# Altium PCB BABA03A_V3.0.0.PcbDoc (part 2 of 2)
Units mil, origin at the board's own origin, x right, y up, seen from the top; angles counter-clockwise.
Board outline 7913.84 x 2796.11 mil, 2 copper layers (Top Layer, Bottom Layer); 189 components, 144 nets, 645 pads, 163 vias.
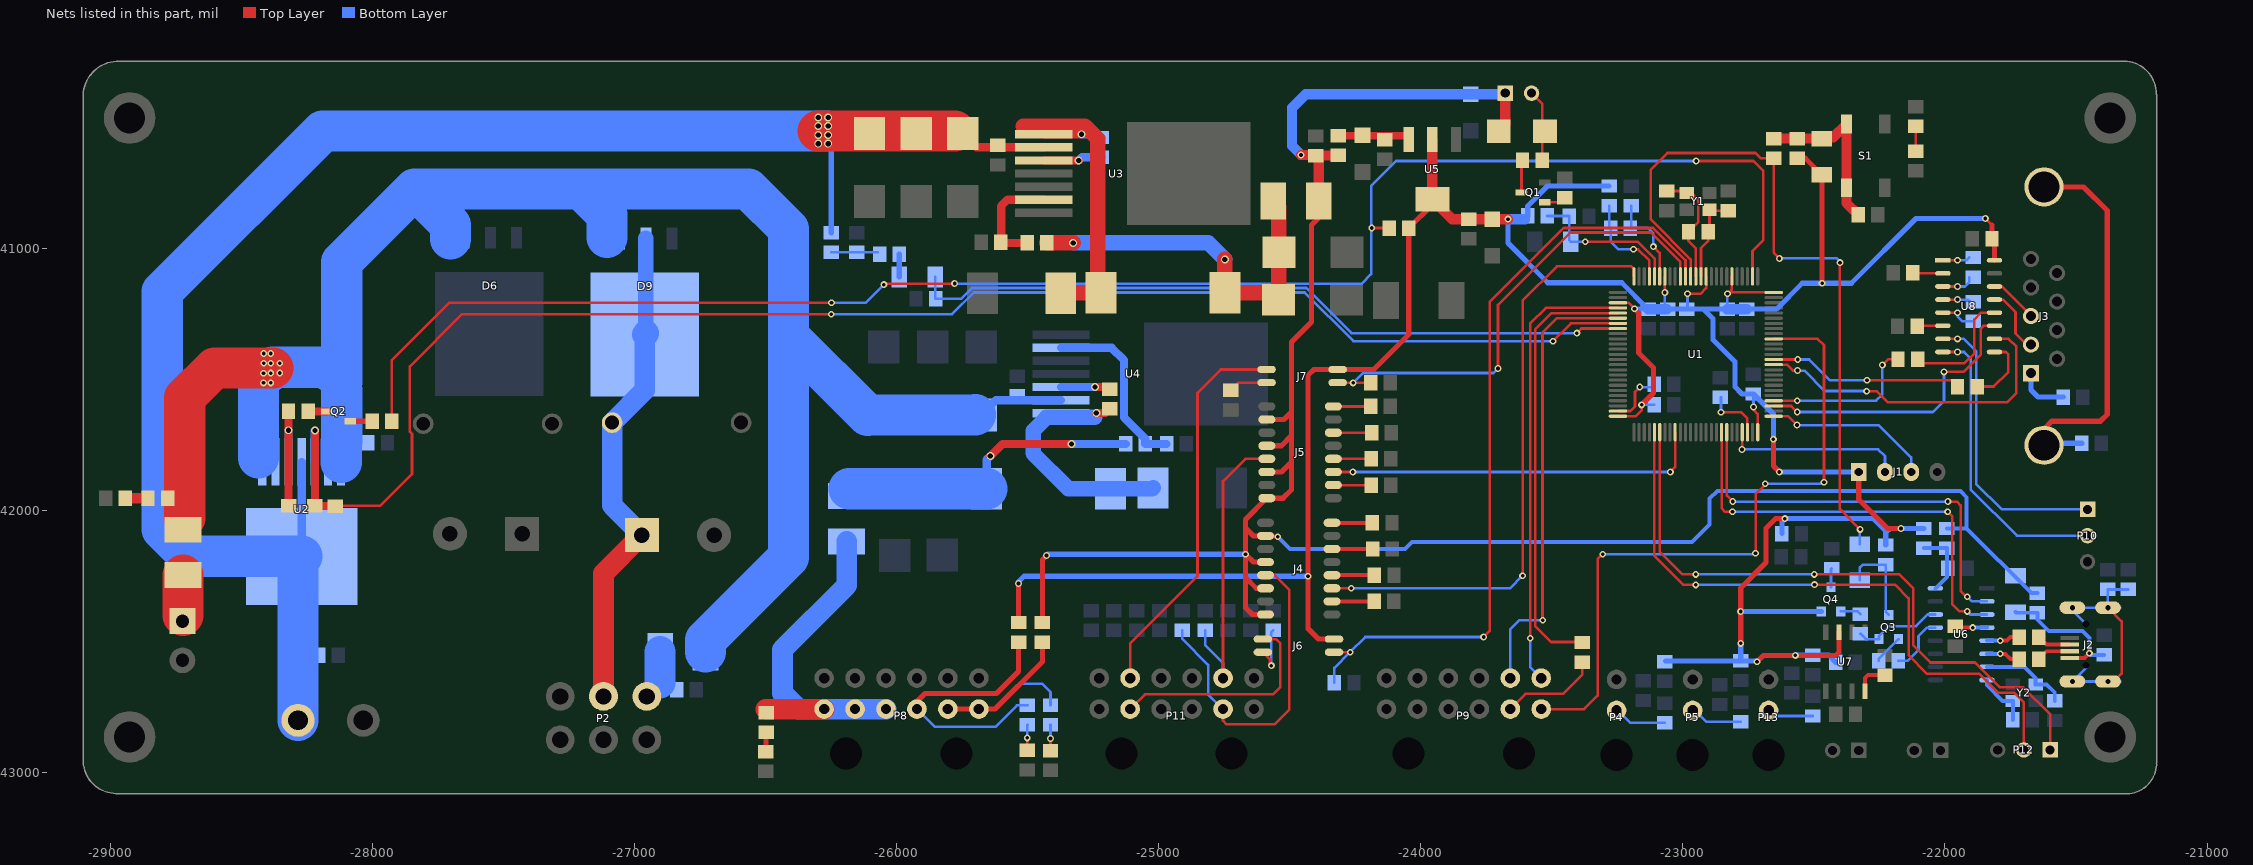
[diagram p2: the nets of this part, all layers, seen from the top]

## Via types
v1: diameter 26, hole 14, Top Layer to Bottom Layer, tented both sides, 145 vias
v2: diameter 30, hole 20, Top Layer to Bottom Layer, tented both sides, 18 vias

## Nets (pads, with @x,y where several pads share a name; then routed paths per layer and width w, separated by ;. In a path a pad name is that pad's centre, name@x,y a point inside that pad or via, vN(x,y) a via of type N, cw(c..) or ccw(c..) an arc to the next point about the centre after c; other vN are vias at no path point) (continued)
NetC1_2: C1.2 D1.1 R1.2 R3.1 S1.2 S1.3 | length 620
  Top Layer w39.37: R1.2@-22654,-40579.6 -22470.61,-40579.6 D1.1@-22470,-40580.21 ; -22426.28,-40574.4 S1.2@-22375.83,-40523.95 S1.3@-22375.83,-40768.05 -22375.83,-40825.57 C1.2@-22331.4,-40870
NetC7_1: C7.1 R10.1 U1.20 | length 357.6
  Top Layer w10: v1(-23113,-40992) -23088.8,-41016.2 U1.20@-23088.8,-41105.76
  Bottom Layer w10: R10.1@-23197,-40836.4 -23197,-40916.4 C7.1@-23201.6,-40921 -23134,-40921 -23113,-40942 v1(-23113,-40992)
NetC7_2: C7.2 R9.1 U1.22 | length 378.6
  Top Layer w10: v1(-23189,-41002) -23171,-41002 -23128.17,-41044.83 U1.22@-23128.17,-41105.76
  Bottom Layer w10: R9.1@-23282,-40835.4 -23282,-40915.4 C7.2@-23276.4,-40921 -23276.4,-40972.6 -23247,-41002 v1(-23189,-41002)
NetC8_1: C8.1 U1.49 | length 203.6
  Top Layer w10: U1.49@-23248.24,-41619.54 -23200.54,-41619.54 -23183,-41602 -23183,-41546 v1(-23165,-41528)
  Bottom Layer w10: v1(-23165,-41528) C8.1@-23115.4,-41528
NetC9_1: C9.1 U1.73 | length 219.7
  Top Layer w10: v1(-22855,-41624) -22779,-41624 -22754.15,-41648.85 U1.73@-22754.15,-41700.24
  Bottom Layer w10: v1(-22855,-41624) -22855,-41567.4 C9.1@-22854.6,-41567
NetC20_1: C20.1 D5.2 L1.1 U3.1 | length 1227.2
  Top Layer w31.5: U3.1@-25439.9,-40562.99 v2(-25295.55,-40562.99)
  Top Layer w59.06: -25518.55,-40531.99 -25282.55,-40531.99 -25234.55,-40579.99 -25234.55,-41104.21 L1.1@-25220.77,-41117.99 ; D5.2@-25374.95,-41169.99 -25372.95,-41167.99 L1.1@-25220.77,-41167.99
  Bottom Layer w31.5: v2(-25295.55,-40562.99) -25233.15,-40562.99 C20.1@-25220.55,-40575.59
NetC20_2: C20.2 U3.3 | length 224.6
  Top Layer w31.5: U3.3@-25439.9,-40662.99 v2(-25306.55,-40662.99)
  Bottom Layer w31.5: v2(-25306.55,-40662.99) -25293.95,-40650.39 C20.2@-25220.55,-40650.39
NetC26_1: C26.1 R16.2 U2.3 | length 482.5
  Top Layer w31.5: R16.2@-28322.4,-41620 -28322,-41620.4 v2(-28322,-41693) C26.1@-28322,-41981.6
  Bottom Layer w31.5: U2.3@-28322,-41813.76 v2(-28322,-41693)
NetC28_1: C28.1 C29.1 F2.1 L1.2 R15.2 | length 1403.1
  Top Layer w59.06: R15.2@-25428.15,-40977.99 v2(-25327.55,-40977.99) ; v2(-24748.55,-41040.99) -24748.55,-41167.77 L1.2@-24748.33,-41167.99 -24569.55,-41167.99 C29.1@-24543.55,-41193.99 C28.1@-24543.55,-41013.99 ; F2.1@-24543.55,-40839.61 -24542.55,-40840.61 C28.1@-24542.55,-41013.99
  Bottom Layer w59.06: v2(-25327.55,-40977.99) -24811.55,-40977.99 v2(-24748.55,-41040.99)
NetC31_1: C31.1 F1.1 P2.1 | length 119.6
  Bottom Layer w118.11: -26903.61,-42657.61 F1.1@-26903.61,-42538
NetC32_1: C32.1 D10.2 L2.1 U4.1 | length 916.7
  Top Layer w31.5: v2(-25239,-41627) -25204.16,-41627 C32.1@-25187.55,-41610.39
  Bottom Layer w59.06: -25244.44,-41643.99 -25429.55,-41643.99 -25480.55,-41694.99 -25480.55,-41780.99 -25345.55,-41915.99 L2.1@-25185.33,-41915.99 -25025.55,-41915.99 D10.2@-25022.55,-41912.99
NetC32_2: C32.2 U4.3 | length 189.5
  Top Layer w31.5: v2(-25244.55,-41527.99) -25195.15,-41527.99 C32.2@-25187.55,-41535.59
  Bottom Layer w31.5: U4.3@-25373.9,-41527.99 v2(-25244.55,-41527.99)
NetC33_1: C33.1 D8.2 D9.2 P2.2 | length 1909
  Top Layer w78.74: P2.2@-27120,-42708.65 -27120,-42239.41 C33.1@-26973.59,-42093
  Bottom Layer w59.06: D9.2@-26958,-41322.91 D9.2@-26958,-40960.66
  Bottom Layer w78.74: C33.1@-26973.59,-42093 -27087,-41979.59 D8.2@-27087,-41664 -26962.09,-41539.09 D9.2@-26962.09,-41327
  Bottom Layer w100: D9.2@-26962.09,-41327 D9.2@-26958,-41322.91
NetC38_1: C38.1 C39.1 F3.1 L2.2 R22.2 | length 1191.8
  Top Layer w31.5: v2(-25643.55,-41790.99) -25597.55,-41744.99 v2(-25333.55,-41744.99)
  Bottom Layer w31.5: L2.2@-25657.77,-41915.99 -25657.77,-41805.21 v2(-25643.55,-41790.99) ; v2(-25333.55,-41744.99) R22.2@-25126.95,-41744.99
  Bottom Layer w157.48: F3.1@-26183,-41915.99 L2.2@-25657.77,-41915.99
NetC42_1: C42.1 C43.2 R29.2 U5.3 | length 275.3
  Top Layer w30: R29.2@-24316.55,-40568.59 -24061.33,-40568.59 U5.3@-24047.1,-40582.82
NetC46_1: C46.1 D16.1 J2.1 R36.2 | length 538.5
  Top Layer w15: J2.1@-21524.14,-42561.93 -21466.93,-42561.93 v1(-21449,-42544)
  Bottom Layer w15: D16.1@-21731,-42386.79 -21728.39,-42389.4 R36.2@-21647,-42389.4 -21647,-42416 -21604,-42459 -21475,-42459 -21449,-42485 v1(-21449,-42544) -21442.6,-42550.4 C46.1@-21393,-42550.4
NetC47_1: C47.1 R33.2 R34.2 U6.16 | length 259.8
  Bottom Layer w15: R34.2@-22081,-42142.4 R33.2@-21993,-42142.4 -21993,-42252.15 U6.16@-22036.85,-42296
NetC48_1: C48.1 U6.4 | length 121.3
  Top Layer w15: C48.1@-21959,-42440.4 -21953.4,-42446 v1(-21894,-42446)
  Bottom Layer w15: v1(-21894,-42446) U6.4@-21840,-42446
NetC49_1: C49.1 J2.0 R40.2 | length 1020.5
  Top Layer w10: J2.0@-21378,-42651.5 -21356.5,-42651.5 -21326,-42621 -21326,-42422 J2.0@-21378,-42370
  Bottom Layer w10: J2.0@-21461.66,-42589.49 -21461.66,-42599.33 J2.0@-21513.83,-42651.5 J2.0@-21378,-42651.5 J2.0@-21331,-42651.5 ; J2.0@-21461.66,-42432.01 -21513.83,-42379.84 J2.0@-21513.83,-42370 J2.0@-21378,-42370 ; J2.0@-21331,-42370 J2.0@-21378,-42370 ; C49.1@-21300,-42300.4 -21378,-42300.4 R40.2@-21379,-42299.4 -21379,-42369 J2.0@-21378,-42370
NetC50_1: C50.1 U6.7 Y2.3 | length 346.1
  Bottom Layer w15: U6.7@-21840,-42596 -21696,-42596 -21654.39,-42637.61 Y2.3@-21654.39,-42663 -21612,-42663 -21581,-42694 C50.1@-21581,-42725.6
NetC51_1: C51.1 U6.8 Y2.1 | length 216
  Bottom Layer w15: U6.8@-21840,-42646 -21840,-42666 -21780.01,-42725.99 Y2.1@-21741,-42725.99 -21741,-42797.6 C51.1@-21741.4,-42798
NetC55_1: C55.1 U8.1 | length 104.3
  Top Layer w10: U8.1@-22008,-41044 v1(-21952,-41044)
  Bottom Layer w10: v1(-21952,-41044) -21918.4,-41044 C55.1@-21908,-41033.6
NetC55_2: C55.2 U8.3 | length 126.5
  Top Layer w10: U8.3@-22008,-41144 v1(-21952,-41144)
  Bottom Layer w10: v1(-21952,-41144) -21923.6,-41144 -21908,-41128.4 C55.2@-21908,-41108.4
NetC57_1: C57.1 U8.4 | length 108.6
  Top Layer w10: U8.4@-22008,-41194 v1(-21952,-41194)
  Bottom Layer w10: v1(-21952,-41194) -21911.6,-41194 C57.1@-21903,-41202.6
NetC57_2: C57.2 U8.5 | length 146.3
  Top Layer w10: U8.5@-22008,-41244 v1(-21952,-41244)
  Bottom Layer w10: v1@-21958,-41244 v1@-21952,-41250 ; v1(-21952,-41244) v1@-21952,-41250 ; C57.2@-21893,-41277.4 -21934,-41277.4 -21952,-41259.4 v1@-21952,-41250
NetC58_2: C58.2 U8.2 | length 116.2
  Top Layer w10: C58.2@-22123,-41091 -22120,-41094 U8.2@-22008,-41094
NetC59_2: C59.2 U8.6 | length 99
  Top Layer w10: C59.2@-22106.6,-41295 -22105.6,-41294 U8.6@-22008,-41294
NetD2_1: D2.1 LS1.2 R5.1 | length 273.7
  Top Layer w10: LS1.2@-23578,-40406 -23537.6,-40446.4 R5.1@-23537.6,-40663
NetD3_1: D3.1 R12.1 | length 95.2
  Top Layer w10: R12.1@-22112,-40627.6 D3.1@-22112,-40532.4
NetD11_1: D11.1 R25.1 | length 86.2
  Top Layer w39.37: D11.1@-28944.6,-41952 R25.1@-28858.4,-41952
NetD12_1: D12.1 R27.2 | length 86.4
  Bottom Layer w20: D12.1@-25991.6,-41107.4 R27.2@-25991.6,-41021
NetD13_1: D13.1 R28.1 | length 73.2
  Top Layer w20: D13.1@-26499.75,-42918.68 R28.1@-26499.75,-42845.48
NetD14_1: D14.1 R18.1 | length 98.2
  Top Layer w10: D14.1@-25414,-42915.6 v1(-25414,-42869)
  Bottom Layer w10: v1(-25414,-42869) R18.1@-25414,-42817.4
NetD15_1: D15.1 R23.1 | length 97.6
  Top Layer w10: D15.1@-25503,-42914.6 v1(-25503,-42867)
  Bottom Layer w10: v1(-25503,-42867) -25503,-42818.4 R23.1@-25502,-42817.4
NetD17_2: D17.2 Q3.3 R35.2 | length 349.7
  Bottom Layer w10: D17.2@-22325,-42266 -22325,-42216.79 -22313.61,-42205.4 R35.2@-22226,-42205.4 -22226,-42386.08 Q3.3@-22214.6,-42397.48
NetF4_1: F4.1 P8.1 P8.2 R18.2 | length 887.8
  Top Layer w20: P8.2@-25805.56,-42757 P8.1@-25687.45,-42757 -25625.67,-42757 -25445,-42576.33 F4.1@-25445,-42501.4
  Bottom Layer w10: P8.1@-25687.45,-42757 -25629,-42757 -25532,-42660 -25446,-42660 -25414,-42692 R18.2@-25414,-42742.6
NetF5_1: F5.1 P8.3 R23.2 | length 1060.1
  Top Layer w20: P8.3@-25923.67,-42757 -25923.67,-42728.67 -25893,-42698 -25620,-42698 -25536,-42614 F5.1@-25536,-42501.4
  Bottom Layer w10: P8.3@-25923.67,-42757 -25855.67,-42825 -25624.45,-42825 -25542.05,-42742.6 R23.2@-25502,-42742.6
NetF6_1: F6.1 P7.1 | length 154.4
  Top Layer w157.48: P7.1@-28725,-42400 F6.1@-28725,-42245.61
NetJ2_2: J2.2 R37.2 | length 130.1
  Top Layer w15: R37.2@-21642,-42566 -21612.34,-42536.34 J2.2@-21524.14,-42536.34
NetJ2_3: J2.3 R38.2 | length 129.8
  Top Layer w15: R38.2@-21642,-42482 -21613.25,-42510.75 J2.3@-21524.14,-42510.75
NetJ3_1: J3.1 R49.2 | length 198.8
  Bottom Layer w20: J3.1@-21672,-41475 -21672,-41539 -21645,-41566 R49.2@-21548.4,-41566
NetJ3_2: J3.2 U8.13 | length 257.8
  Top Layer w10: U8.13@-21811.15,-41194 -21779,-41194 -21731,-41242 -21731,-41323 -21688,-41366 J3.2@-21672,-41366
NetJ3_3: J3.3 U8.14 | length 187.1
  Top Layer w10: U8.14@-21811.15,-41144 -21783,-41144 -21672,-41255 J3.3@-21672,-41257
NetJ3_10: J3.10 J3.11 R52.2 | length 1528.8
  Top Layer w20: J3.11@-21622,-41750 -21622,-41689 -21591,-41658 -21407,-41658 -21381,-41632 -21381,-40854 -21471,-40764 J3.10@-21622,-40764
  Bottom Layer w20: J3.11@-21622,-41750 -21614,-41742 R52.2@-21478.4,-41742
NetJ4_2: J4.2 R55.1 | length 161.2
  Top Layer w15: J4.2@-24339.58,-42345.99 R55.1@-24178.4,-42346
NetJ4_4: J4.4 R61.1 | length 161.7
  Top Layer w15: J4.4@-24339.58,-42245.99 R61.1@-24177.85,-42245.99
NetJ4_6: J4.6 R67.1 | length 155.7
  Top Layer w15: J4.6@-24339.58,-42145.99 R67.1@-24183.85,-42145.99
NetJ4_8: J4.8 R73.1 | length 154.2
  Top Layer w15: J4.8@-24339.58,-42045.99 R73.1@-24185.4,-42046
NetJ5_2: J5.2 R58.1 | length 141.2
  Top Layer w10: J5.2@-24334.58,-41901.99 R58.1@-24193.41,-41901.99
NetJ5_4: J5.4 R64.1 | length 145.2
  Top Layer w10: J5.4@-24334.58,-41801.99 R64.1@-24189.4,-41802
NetJ5_6: J5.6 R70.1 | length 146.2
  Top Layer w10: J5.6@-24334.58,-41701.99 R70.1@-24188.4,-41702
NetJ5_8: J5.8 R76.1 | length 142.2
  Top Layer w10: J5.8@-24334.58,-41601.99 R76.1@-24192.4,-41602
NetJ6_2: J6.2 R78.1 | length 205.1
  Top Layer w10: J6.2@-24603.3,-42543.24 J6.2@-24603.3,-42539.99 -24576.13,-42567.16 -24576.13,-42585.87 v1(-24571,-42591)
  Bottom Layer w10: v1(-24571,-42591) -24571,-42463.4 R78.1@-24564,-42456.4
NetJ7_2: J7.2 R79.1 | length 149
  Top Layer w10: R79.1@-24726,-41540.6 -24696.39,-41510.99 J7.2@-24589.3,-41510.99
NetP4_1: P4.1 R45.1 | length 205.3
  Bottom Layer w10: P4.1@-23253.55,-42756.99 -23201.14,-42809.4 R45.1@-23070,-42809.4
NetP5_1: P5.1 R46.1 | length 193.4
  Bottom Layer w10: P5.1@-22955,-42761 -22910.6,-42805.4 R46.1@-22780,-42805.4
NetP10_1: P10.1 U8.7 | length 1118.1
  Top Layer w10: U8.7@-22008,-41344 v1(-21952,-41344)
  Bottom Layer w10: v1(-21952,-41344) -21928,-41344 -21881,-41391 -21881,-41897 -21783,-41995 P10.1@-21456,-41995
NetP10_2: P10.2 U8.8 | length 1135.3
  Top Layer w10: U8.8@-22008,-41394 v1(-21952,-41394)
  Bottom Layer w10: v1(-21952,-41394) -21927,-41394 -21901,-41420 -21901,-41920 -21726,-42095 P10.2@-21456,-42095
NetP13_1: P13.1 R32.1 | length 176.9
  Bottom Layer w10: P13.1@-22673,-42762 -22651.6,-42783.4 R32.1@-22505,-42783.4
NetQ1_1: Q1.1 R6.1 | length 83.5
  Top Layer w10: Q1.1@-23527.71,-40822.4 -23467.4,-40822.4 R6.1@-23451,-40806
NetQ1_3: Q1.3 R5.2 | length 123.6
  Top Layer w10: Q1.3@-23616.29,-40785 -23616.29,-40666.89 R5.2@-23612.4,-40663
NetQ2_1: Q2.1 R19.1 | length 83.7
  Top Layer w20: Q2.1@-28086.71,-41658.4 R19.1@-28003,-41658.4
NetQ2_3: Q2.3 R16.1 | length 72.7
  Top Layer w31.5: R16.1@-28247.6,-41620 -28246.6,-41621 Q2.3@-28175.29,-41621
NetQ3_1: Q3.1 R39.1 | length 114.6
  Bottom Layer w10: R39.1@-22253.4,-42573 -22253.4,-42566.2 Q3.1@-22177.2,-42490
NetQ3_2: Q3.2 R41.2 U6.14 | length 340.1
  Bottom Layer w10: R41.2@-22323,-42469.4 -22302.4,-42490 Q3.2@-22252,-42490 -22252,-42479 -22213.5,-42440.5 -22110.5,-42440.5 -22066,-42396 U6.14@-22036.85,-42396
NetQ4_1: Q4.1 R41.1 | length 78.9
  Bottom Layer w10: Q4.1@-22397.6,-42384.26 -22333.34,-42384.26 R41.1@-22323,-42394.6
NetQ4_3: Q4.3 R42.1 | length 72.2
  Bottom Layer w10: Q4.3@-22435,-42291.74 -22435,-42222.4 R42.1@-22433,-42220.4
NetR2_1: R2.1 U1.30 | length 1678.4
  Top Layer w10: R2.1@-23385,-42503 -23387,-42501 -23503,-42501 -23564,-42440 -23564,-41308.52 -23501,-41245.52 U1.30@-23248.24,-41245.52
NetR14_2: R14.2 R15.1 U3.6 | length 411.9
  Top Layer w31.5: R14.2@-25603.15,-40975.99 -25601.15,-40977.99 R15.1@-25502.95,-40977.99 ; R14.2@-25602.15,-40975.99 -25602.15,-40837.59 -25577.55,-40812.99 U3.6@-25439.9,-40812.99
NetR21_2: R21.2 R22.1 U4.6 | length 694.7
  Bottom Layer w31.5: U4.6@-25373.9,-41377.99 -25180.55,-41377.99 -25133.55,-41424.99 -25133.55,-41643.99 -25052.15,-41725.39 R22.1@-25052.15,-41744.99 R21.2@-24970.95,-41744.99
NetR24_2: R24.2 R27.1 R30.1 | length 177
  Bottom Layer w10: R24.2@-26251,-41013.4 R30.1@-26154,-41013.4 R27.1@-26074,-41013.4
NetR39_2: R39.2 U6.13 | length 225.4
  Bottom Layer w10: R39.2@-22178.6,-42573 -22143,-42573 -22101,-42531 -22101,-42478 -22069,-42446 U6.13@-22036.85,-42446
NetR47_1: R47.1 U7.8 | length 130.3
  Top Layer w15: U7.8@-22305,-42688.5 -22305,-42639 -22293.4,-42627.4 R47.1@-22229,-42627.4
NetR50_1: R50.1 U8.12 | length 455.2
  Top Layer w10: R50.1@-22104.6,-41422 -22089.6,-41437 -21926,-41437 -21888,-41399 -21888,-41270 -21862,-41244 U8.12@-21811.15,-41244
NetR51_1: R51.1 U8.9 | length 266.7
  Top Layer w10: R51.1@-21877.6,-41526 -21814,-41526 -21758,-41470 -21758,-41403 -21767,-41394 U8.9@-21811.15,-41394
OSC_16_N: C6.1 R4.1 U1.13 Y1.3 | length 452.2
  Top Layer w10: C6.1@-23061.12,-40779.6 -22993.33,-40779.6 Y1.3@-22985.43,-40787.5 -22968.3,-40787.5 -22941.8,-40814 -22941.8,-40899 R4.1@-22978.8,-40936 -22978.8,-40970.53 -22951,-40998.33 U1.13@-22951,-41105.76
OSC_16_P: C5.2 R4.2 U1.12 Y1.1 | length 342
  Top Layer w10: U1.12@-22931.32,-41105.76 -22931.32,-40997.84 -22904,-40970.53 R4.2@-22904,-40936 -22898.81,-40930.81 Y1.1@-22898.81,-40850.5 -22894.91,-40854.4 C5.2@-22827.12,-40854.4
PG_IN_L: J6.1 P11.5 | length 847.8
  Top Layer w10: P11.5@-25109.81,-42756.99 -25053.81,-42700.99 -24565.55,-42700.99 -24536.55,-42671.99 -24536.55,-42505.99 -24552.55,-42489.99 J6.1@-24603.3,-42489.99
PG_IN_R: J7.1 P11.11 | length 1495.8
  Top Layer w10: P11.11@-25109.81,-42638.88 -25109.81,-42506.81 -24853,-42250 -24853,-41550 -24763.99,-41460.99 J7.1@-24589.3,-41460.99
PG_L: J6.3 R77.2 U1.15 | length 3001.1
  Top Layer w10: J6.3@-24331.8,-42539.99 v1(-24270,-42540) ; v1(-23761,-42482) -23738,-42459 -23738,-41203 -23456,-40921 -23114.04,-40921 -22990.37,-41044.67 U1.15@-22990.37,-41105.76
  Bottom Layer w10: R77.2@-24330.4,-42656 -24330.4,-42600.4 v1(-24270,-42540) -24212,-42482 v1(-23761,-42482)
PG_R: J7.3 R80.1 U1.16 | length 1857
  Top Layer w10: J7.3@-24316.8,-41512 v1(-24259,-41512) -24192.4,-41512 R80.1@-24191.4,-41511 ; v1(-23706,-41457) -23706,-41214 -23430,-40938 -23122,-40938 -23010.06,-41049.94 U1.16@-23010.06,-41105.76
  Bottom Layer w10: v1(-24259,-41512) -24221.46,-41474.46 -23723.46,-41474.46 v1(-23706,-41457)
PROFET_IN: R17.2 R19.2 U1.2 | length 6481.9
  Top Layer w10: R19.2@-27927.6,-41659 -27927.6,-41425.6 -27708,-41206 v1(-26250,-41206) ; v1(-26050,-41137) -26046,-41133 v1(-25780,-41133) ; v1(-24188,-40921) R17.2@-24121.4,-40921 ; v1(-22950,-40665) -22731,-40665 -22694,-40702 -22694,-40968 -22734.46,-41008.46 U1.2@-22734.46,-41105.76
  Bottom Layer w10: v1(-26250,-41206) -26119,-41206 v1(-26050,-41137) ; v1(-25780,-41133) -24226,-41133 -24190,-41097 -24190,-40760 -24095,-40665 v1(-22950,-40665)
PROFET_IS: C25.1 R20.2 U1.32 U2.5 | length 6077.1
  Top Layer w10: C25.1@-28145.6,-41981.6 -27972.6,-41981.6 -27851,-41860 -27851,-41706.27 -27859.5,-41697.77 -27859.5,-41449.5 -27660,-41250 v1(-26251,-41250) ; v1(-23496,-41353) -23427.89,-41284.89 U1.32@-23248.24,-41284.89
  Top Layer w31.5: v2(-28221,-41694) -28221,-41980.6 R20.2@-28222,-41981.6 C25.1@-28145.6,-41981.6
  Bottom Layer w10: v1(-26251,-41250) -25789.92,-41250 -25706.92,-41167 -24444,-41167 -24258,-41353 v1(-23496,-41353)
  Bottom Layer w31.5: U2.5@-28222,-41813.76 -28222,-41695 v2(-28221,-41694)
RELAY_IN: C21.2 C34.1 C35.1 C36.1 C37.2 D6.1 D9.1 F1.2 F6.2 R25.2 U2.1 U2.2 U2.6 U2.7 U4.2 | length 7510.4
  Top Layer w157.48: F6.2@-28718,-42028 -28718,-41568 -28605,-41455 -28381,-41455
  Bottom Layer w31.5: C34.1@-25701.55,-41633.99 C34.1@-25678.55,-41634.99 -25621.55,-41577.99 U4.2@-25373.9,-41577.99
  Bottom Layer w157.48: U2.1@-28437,-41798.76 -28437,-41508 -28381,-41452 -28176,-41452 -28119.51,-41508.49 -28119.51,-41050.51 -27841,-40772 ; U2.7@-28120.51,-41814.76 -28120.51,-41737.04 -28119.51,-41736.04 -28119.51,-41539.51 ; -27704,-40963 -27704,-40909 -27841,-40772 ; -27107,-40956 -27107,-40870 -27205,-40772 ; F1.2@-26730.39,-42538 -26730.39,-42493.39 -26414,-42177 -26414,-40925 -26567,-40772 -27205,-40772 ; -26406.73,-41341.78 -26111.66,-41635.17 C36.1@-26049.55,-41634.99 -25864.05,-41634.46 C34.1@-25701.55,-41633.99 ; -27841,-40772 -27205,-40772
  other v1: -28418,-41512 -28390,-41512 -28418,-41475 -28390,-41474.67 -28356,-41474 -28390,-41437.33 -28417,-41437 -28356,-41437 -28417,-41400 -28390,-41400
RESET: D17.1 R1.1 U1.14 | length 2713.4
  Top Layer w10: U1.14@-22970.68,-41105.76 -22970.68,-41040.32 -23123,-40888 -23123,-40698 -23059.7,-40634.7 -22723.3,-40634.7 -22703.6,-40654.4 R1.1@-22654,-40654.4 -22654,-41015 v1(-22632,-41037) ; v1(-22401,-41053) -22401,-41994 v1(-22324,-42071)
  Bottom Layer w10: v1(-22632,-41037) -22413,-41037 -22401,-41049 v1(-22401,-41053) ; D17.1@-22325,-42128.21 -22325,-42083 -22324,-42082 v1(-22324,-42071)
SPI1_MISO: P9.8 U1.31 | length 1735.8
  Top Layer w10: v1(-23535,-42418) -23535,-42419 -23536,-42418 -23536,-41320 -23481.2,-41265.2 U1.31@-23248.24,-41265.2
  Bottom Layer w10: P9.8@-23659.07,-42638.81 -23659.07,-42452 -23625.07,-42418 v1(-23535,-42418)
SPI1_MOSI: P9.1 U1.91 | length 2601.7
  Top Layer w10: P9.1@-23540.96,-42756.92 -23376.92,-42756.92 -23326,-42706 -23326,-42184 -23308,-42166 v1(-23306,-42166) ; v1(-22723,-42162) -22723,-41937 -22686,-41900 v1(-22686,-41897) ; U1.91@-22653.76,-41343.94 -22486.06,-41343.94 -22462,-41368 v1(-22462,-41891)
  Bottom Layer w10: v1(-23306,-42166) -22727,-42166 v1(-22723,-42162) ; v1(-22686,-41897) -22468,-41897 v1(-22462,-41891)
SPI1_NSS: P9.7 U1.29 | length 1730
  Top Layer w10: v1(-23583,-42487) -23583,-41285.83 -23523,-41225.83 U1.29@-23248.24,-41225.83
  Bottom Layer w10: v1(-23583,-42487) -23583,-42596.77 P9.7@-23540.96,-42638.81
SPI1_SCK: P9.2 R2.2 | length 376.5
  Top Layer w10: P9.2@-23659.07,-42756.92 -23601.15,-42699 -23458,-42699 -23385,-42626 R2.2@-23385,-42577.8
SV_L: J4.3 U1.25 | length 2309.5
  Top Layer w10: J4.3@-24339.58,-42295.99 v1(-24266.01,-42295.99) ; v1(-23612,-42248) -23612,-41198.08 -23480.92,-41067 -23197,-41067 -23187.22,-41076.78 U1.25@-23187.22,-41105.76
  Bottom Layer w10: v1(-24266.01,-42295.99) -23659.99,-42295.99 v1(-23612,-42248)
SV_OUT_L: J4.13 P11.2 R62.1 | length 1290.2
  Top Layer w10: P11.2@-24755.48,-42756.99 -24755.48,-42801.07 -24741.55,-42814.99 -24558.59,-42814.99 -24502.55,-42758.95 -24502.55,-42301.99 -24558.55,-42245.99 J4.13@-24593.52,-42245.99
  Bottom Layer w10: R62.1@-24911,-42455.8 -24911,-42489 -24812,-42588 -24812,-42700.47 P11.2@-24755.48,-42756.99 P11.2@-24755.48,-42784.52
SV_OUT_R: J5.13 P11.8 R63.1 | length 1165.2
  Top Layer w10: P11.8@-24755.48,-42638.88 -24755.48,-41887.48 -24669.99,-41801.99 J5.13@-24588.52,-41801.99
  Bottom Layer w10: R63.1@-24824,-42455.8 -24824,-42513 -24755.48,-42581.52 P11.8@-24755.48,-42638.88
SV_R: J5.3 U1.59 | length 1445.9
  Top Layer w10: J5.3@-24334.58,-41851.99 v1(-24260,-41852) ; v1(-23048,-41852) -23029.74,-41833.74 U1.59@-23029.74,-41700.24
  Bottom Layer w10: v1(-24260,-41852) v1(-23048,-41852)
SYS_SWCLK: J1.3 U1.76 | length 645.1
  Top Layer w10: U1.76@-22653.76,-41639.22 -22598.78,-41639.22 v1(-22565,-41673)
  Bottom Layer w10: v1(-22565,-41673) -22253,-41673 -22129,-41797 J1.3@-22129,-41852
SYS_SWDIO: J1.2 U1.72 | length 683
  Top Layer w10: v1(-22775,-41766) -22773.83,-41764.83 U1.72@-22773.83,-41700.24
  Bottom Layer w10: v1(-22775,-41766) -22255,-41766 -22229,-41792 J1.2@-22229,-41852
U_SENSE: C40.2 D12.2 U1.33 | length 2783.1
  Top Layer w10: v1(-23405,-41322) -23387.57,-41304.57 U1.33@-23248.24,-41304.57
  Bottom Layer w10: D12.2@-25853.21,-41108 -25853.21,-41190.39 C40.2@-25852.6,-41191 -25754.96,-41191 -25713.96,-41150 -24436.96,-41150 -24264.96,-41322 v1(-23405,-41322)
UART4_RX: R50.2 U1.79 | length 605.5
  Top Layer w10: U1.79@-22653.76,-41580.17 v1(-22564.17,-41580.17) ; v1(-22239,-41444) -22217,-41422 R50.2@-22179.4,-41422
  Bottom Layer w10: v1(-22564.17,-41580.17) -22263.17,-41580.17 -22239,-41556 v1(-22239,-41444)
UART4_TX: U1.78 U8.11 | length 1111.5
  Top Layer w10: U1.78@-22653.76,-41599.85 -22653.61,-41600 -22587,-41600 v1(-22564,-41623) ; v1(-22004,-41470) -21930,-41470 -21863,-41403 -21863,-41304 -21853,-41294 U8.11@-21811.15,-41294
  Bottom Layer w10: v1(-22564,-41623) -22046,-41623 -22004,-41581 v1(-22004,-41470)
USART1_RX: U1.69 U6.2 | length 1593.5
  Top Layer w10: U1.69@-22832.89,-41700.24 -22832.89,-41942 v1(-22809.89,-41965) ; v1(-21989,-41965) -21955,-41965 -21940,-41980 -21940,-42307 -21919,-42328 v1(-21915,-42328)
  Bottom Layer w10: v1(-22809.89,-41965) v1(-21989,-41965) ; v1(-21915,-42328) -21897,-42346 U6.2@-21840,-42346
USART1_TX: U1.68 U6.3 | length 1667
  Top Layer w10: U1.68@-22852.57,-41700.24 -22852.57,-41990.43 -22839,-42004 v1(-22811,-42004) ; v1(-21990,-42004) -21973,-42021 -21973,-42356 -21945,-42384 v1(-21915,-42384)
  Bottom Layer w10: v1(-22811,-42004) v1(-21990,-42004) ; v1(-21915,-42384) -21903,-42396 U6.3@-21840,-42396
USART2_RX: R51.2 U1.87 | length 744.1
  Top Layer w10: U1.87@-22653.76,-41422.68 v1(-22562.32,-41422.68) ; v1(-22298,-41502) -21976.4,-41502 R51.2@-21952.4,-41526
  Bottom Layer w10: v1(-22562.32,-41422.68) -22518.32,-41422.68 -22439,-41502 v1(-22298,-41502)
USART2_TX: U1.86 U8.10 | length 1272.3
  Top Layer w10: U1.86@-22653.76,-41442.37 -22603.63,-41442.37 -22581,-41465 v1(-22563,-41465) ; v1(-22299,-41544) -22260,-41544 -22218,-41586 -21764,-41586 -21728,-41550 -21728,-41373 -21757,-41344 U8.10@-21811.15,-41344
  Bottom Layer w10: v1(-22563,-41465) -22537.04,-41465 -22459.04,-41543 -22300,-41543 v1(-22299,-41544)
USART3_RX: P12.1 U1.56 | length 2466.8
  Top Layer w10: U1.56@-23088.8,-41700.24 -23088.8,-42156.2 -23002,-42243 v1(-22951,-42243) ; v1(-22499,-42243) -22174,-42243 -22121,-42296 -22121,-42514 -22056,-42579 -21886,-42579 -21791,-42674 -21701.64,-42674 -21599,-42776.64 P12.1@-21599,-42913
  Bottom Layer w10: v1(-22951,-42243) v1(-22499,-42243)
USART3_TX: P12.2 U1.55 | length 2423.1
  Top Layer w10: U1.55@-23108.48,-41700.24 -23109,-41700.76 -23109,-42172 -22998,-42283 v1(-22951,-42283) ; v1(-22498,-42282) -22191,-42282 -22139,-42334 -22139,-42551.32 -22068,-42622.32 -21868.68,-42622.32 -21797,-42694 -21737,-42694 -21699,-42732 P12.2@-21699,-42913
  Bottom Layer w10: v1(-22951,-42283) -22499,-42283 v1(-22498,-42282)
USB_N: R37.1 U6.6 | length 131.5
  Top Layer w15: v1(-21789,-42546) -21769.89,-42546 -21749.89,-42566 R37.1@-21716.8,-42566
  Bottom Layer w15: U6.6@-21840,-42546 v1(-21789,-42546)
USB_P: R38.1 U6.5 | length 129
  Top Layer w15: v1(-21789,-42496) -21763.89,-42496 -21749.89,-42482 R38.1@-21716.8,-42482
  Bottom Layer w15: U6.5@-21840,-42496 v1(-21789,-42496)
VCC_3V3: C10.1 C13.1 C14.1 C15.1 C16.1 C17.1 C18.1 C44.2 C45.1 C52.2 C56.2 D1.2 F5.2 J1.1 J6.4 J7.4 Q4.2 R3.2 R7.1 R9.2 R11.2 R17.1 R31.2 R34.1 R35.1 R43.2 R44.2 U1.6 U1.11 U1.19 U1.28 U1.50 U1.75 U1.100 U5.2 U5.4 U7.3 U8.16 | length 12612
  Top Layer w10: U1.50@-23248.24,-41639.22 -23180.22,-41639.22 -23158,-41617 v1(-23158,-41596) ; U1.28@-23248.24,-41206.15 -23207.85,-41206.15 v1(-23185,-41229) ; U1.19@-23069.11,-41105.76 -23069.11,-41166.89 v1(-23069,-41167) ; v1(-22983,-41172) -22933,-41172 -22911.63,-41150.63 U1.11@-22911.63,-41105.76 ; v1(-22830,-41172) v1@-22824.78,-41166.78 ; U1.6@-22813.2,-41105.76 -22813.2,-41155.2 v1@-22824.78,-41166.78 ; v1(-22731,-41604) -22731,-41614 -22714.78,-41630.22 U1.75@-22714.78,-41700.24 ; U1.100@-22653.76,-41166.78 v1@-22824.78,-41166.78 ; R3.2@-22567,-40657.4 R3.2@-22564,-40654.4 ; v1(-21846,-40884.4) -21820.6,-40909.8
  Top Layer w19.68: v1(-23185,-41229) -23169,-41245 -23169,-41398 -23113,-41454 -23113,-41551 v1(-23158,-41596) ; v1(-22655,-41727) -22655,-41829 v1(-22632,-41852) ; R3.2@-22564,-40654.4 -22533.6,-40654.4 D1.2@-22470,-40718 -22470,-41133 v1(-22469,-41132)
  Top Layer w20: F5.2@-25536,-42426.6 v1(-25536,-42278) ; J6.4@-24331.8,-42489.99 -24391.01,-42489.99 -24431,-42450 v1(-24431,-42250) -24431,-41483.12 -24408.87,-41460.99 J7.4@-24317.8,-41460.99 -24179.99,-41460.99 -24046.6,-41327.6 R17.1@-24046.6,-40921 -23956.55,-40830.95 U5.4@-23956.55,-40811.17 ; v1(-22779.8,-42506.2) -22779.8,-42294.8 -22683,-42198 -22683,-42067 -22646,-42030 v1(-22611,-42030) ; v1(-22717.6,-42576.6) -22693,-42552 v1(-22571,-42552) -22417,-42552 -22405,-42540 U7.3@-22405,-42463.5 ; J1.1@-22329,-41852 -22329,-41957 -22218.4,-42067.6 v1(-22168,-42067.6) ; -21820.6,-40909.8 C56.2@-21820.6,-40962 -21811.15,-40971.45 U8.16@-21811.15,-41044
  Top Layer w39.37: U5.2@-23956.55,-40582.82 U5.4@-23956.55,-40811.17 -23880.72,-40887 C45.1@-23728,-40887 v1(-23668,-40887)
  Bottom Layer w10: v1(-23158,-41596) C10.1@-23109.4,-41596 ; v1(-23069,-41167) -23069,-41223.6 C13.1@-23062,-41230.6 ; C16.1@-22988.4,-41229 -22981.4,-41222 -22983,-41220.4 v1(-22983,-41172) ; C14.1@-22831,-41227.6 -22831,-41173 v1(-22830,-41172) ; v1(-22731,-41604) C18.1@-22731,-41554.4
  Bottom Layer w19.68: v1(-23668,-40887) -23668,-40978 -23516,-41130 -23233.6,-41130 C15.1@-23133,-41230.6 -23183.4,-41230.6 v1(-23185,-41229) ; R11.2@-23592.4,-40875 -23592.4,-40836.4 -23516.6,-40760.6 R9.2@-23282,-40760.6 ; C13.1@-23062,-41230.6 C13.1@-23059,-41230.6 -22922,-41230.6 ; C14.1@-22831,-41230.6 -22922,-41230.6 ; C17.1@-22757,-41230.6 -22643.6,-41230.6 -22545,-41132 v1(-22469,-41132) ; v1(-22655,-41727) -22655,-41630.4 C18.1@-22731,-41554.4 -22774.6,-41554.4 -22802,-41527 -22802,-41431 -22885.6,-41347.4 -22885.6,-41267 -22922,-41230.6 ; v1@-22469,-41131 v1(-22469,-41132) ; v1(-21846,-40884.4) -22110.4,-40884.4 -22358,-41132 v1(-22469,-41132)
  Bottom Layer w20: v1(-25536,-42278) -25536,-42271 -25515,-42250 v1(-24431,-42250) ; R43.2@-23065.41,-42573.01 -22721.19,-42573.01 v1(-22717.6,-42576.6) ; v1(-22780,-42384.26) Q4.2@-22472.4,-42384.26 ; R44.2@-22779.8,-42573 v1(-22779.8,-42506.2) ; v1(-22632,-41852) J1.1@-22329,-41852 ; R7.1@-22622.4,-42087 -22622.4,-42041.4 v1(-22611,-42030) -22274,-42030 -22226,-42078 -22226,-42083.6 ; v1(-22571,-42552) -22570.6,-42551.6 R31.2@-22505,-42551.6 -22443.8,-42551.6 C52.2@-22417.4,-42578 ; R35.1@-22226,-42130.6 -22226,-42083.6 ; R34.1@-22081,-42067.6 v1(-22168,-42067.6) -22210,-42067.6 -22226,-42083.6
  Bottom Layer w39.37: v1(-23668,-40887) R11.2@-23604.4,-40887 ; C15.1@-23133,-41230.6 C13.1@-23062,-41230.6 ; C14.1@-22831,-41230.6 C17.1@-22757,-41230.6
VCC_5V: C4.1 C41.2 D2.2 D16.2 F2.2 F4.2 J4.10 J4.12 J4.14 J4.16 J5.10 J5.12 J5.14 J5.16 LS1.1 R29.1 R33.1 R36.1 | length 8344.6
  Top Layer w15: J4.10@-24593.52,-42095.99 -24590.51,-42099 v1(-24547,-42099)
  Top Layer w20: F4.2@-25445,-42426.6 -25445,-42187 v1(-25429,-42171) ; J4.16@-24593.52,-42395.99 -24643.55,-42395.99 -24669.55,-42369.99 -24669.55,-42255 ; J4.14@-24593.52,-42295.99 -24628.56,-42295.99 -24669.55,-42255 ; J4.12@-24593.52,-42195.99 -24639.55,-42195.99 v1(-24669.55,-42165.99) ; J4.10@-24593.52,-42095.99 -24639.56,-42095.99 -24669.55,-42066 ; J5.14@-24588.52,-41851.99 -24531.99,-41851.99 -24494,-41814 ; J5.12@-24588.52,-41751.99 -24532.99,-41751.99 -24494,-41713 ; J5.10@-24588.52,-41651.99 -24522.99,-41651.99 -24494,-41623 ; F2.2@-24390.39,-40818 -24390.39,-40882.39 -24418,-40910 -24418,-41280 -24494,-41356 -24494,-41623 ; -24669.55,-42255 v1(-24669.55,-42165.99) ; v1(-24669.55,-42165.99) -24669.55,-42066 ; -24669.55,-42066 -24669.55,-42033.02 J5.16@-24588.52,-41951.99 -24525.99,-41951.99 -24494,-41920 -24494,-41814 ; -24494,-41814 -24494,-41713 ; -24494,-41713 -24494,-41623
  Top Layer w39.37: v1(-24458,-40642) -24404.4,-40642 C41.2@-24402,-40644.4 ; F2.2@-24390.39,-40818 -24390.39,-40656.02 C41.2@-24402,-40644.4 ; R29.1@-24316.55,-40643.39 -24317.56,-40644.4 C41.2@-24402,-40644.4 ; D2.2@-23703.58,-40552 -23678,-40526.42 LS1.1@-23678,-40406
  Bottom Layer w15: v1(-24547,-42099) -24500,-42146 -24061,-42146 -24035,-42120 -22966,-42120 -22898,-42052 -22898,-41954 -22868.5,-41924.5 -21941.5,-41924.5 -21917.4,-41948.6 -21917.4,-42067.6 ; R33.1@-21993,-42067.6 -21917.4,-42067.6 ; R36.1@-21647,-42314.6 -21670.4,-42314.6 -21917.4,-42067.6
  Bottom Layer w20: v1(-25429,-42171) -25423.99,-42165.99 v1(-24669.55,-42165.99)
  Bottom Layer w39.37: v1(-24458,-40642) -24492,-40608 -24492,-40462 -24440,-40410 C4.1@-23810,-40410 -23682,-40410 LS1.1@-23678,-40406
VCC_12V: F3.2 P8.4 P8.5 P8.6 R28.2 | length 1322.5
  Top Layer w78.74: R28.2@-26499.75,-42757 P8.6@-26278,-42757
  Bottom Layer w78.74: F3.2@-26192,-42117.23 -26192,-42285 -26437,-42530 -26437,-42696 -26376,-42757 P8.6@-26278,-42757 P8.5@-26159.89,-42757 P8.4@-26041.78,-42757
VCC_24V: C19.2 C22.1 C23.1 C24.1 C27.2 P1.1 R24.1 U2.4 U2.8 U3.2 | length 6446.3
  Top Layer w31.5: C22.1@-25749,-40560 -25696.01,-40612.99 U3.2@-25439.9,-40612.99
  Top Layer w157.48: v2@-26300.55,-40550.99 C22.1@-25779.55,-40550.99
  Bottom Layer w20: R24.1@-26251,-40938.6 -26251,-40610.54
  Bottom Layer w31.5: U2.8@-28272,-42174 U2.4@-28272,-41813.76
  Bottom Layer w157.48: P1.1@-28286,-42800 -28286,-42188 U2.8@-28272,-42174 -28701,-42174 -28804,-42071 -28804,-41163 -28192,-40551 v2@-26266,-40551
  other v2: -26300.55,-40598.99 -26262.55,-40598.99 -26300.55,-40565.49 -26262.55,-40565.49 -26300.55,-40531.99 -26262.55,-40531.99 -26300.55,-40498.99 -26262.55,-40498.99
VREF+: D4.2 R11.1 R13.2 U1.21 | length 598.4
  Top Layer w10: v1(-23373,-40973) -23173,-40973 -23108.48,-41037.52 U1.21@-23108.48,-41105.76
  Bottom Layer w10: R11.1@-23517.6,-40875 -23434.4,-40875 R13.2@-23433.4,-40876 -23433.4,-40967.8 D4.2@-23428.21,-40973 v1(-23373,-40973)
pads on no net: D6.3 D9.3 J2.4 J3.4 J3.6 J3.7 J3.8 J3.9 P4.0 P5.0 P8.0 P9.0 P11.0 P13.0 U1.1 U1.3 U1.4 U1.7 U1.8 U1.9 U1.17 U1.18 U1.26 U1.34 U1.41 U1.42 U1.43 U1.44 U1.45 U1.46 U1.53 U1.54 U1.57 U1.58 U1.60 U1.66 U1.67 U1.70 U1.71 U1.77 U1.80 U1.83 U1.84 U1.85 U1.88 U1.89 U1.90 U1.92 U1.93 U1.95 U1.96 U1.98 U3.5 U3.7 U4.5 U4.7 U6.9 U6.10 U6.11 U6.12 U6.15 U7.5

## Polygon pours and split planes (outlines as drawn)
AGND on Top Layer "Bottom Layer-No Net" (solid, remove dead copper, pour order 0): -29367.62,-39946.02 -29384.62,-39963.02 -29384.62,-43185.02 -24567.62,-43238.02 -24449.62,-43146.02 -24449.62,-41387.02 -24085.62,-41387.02 -24085.62,-40129.02
DGND on Top Layer "Bottom Layer-No Net" (solid, remove dead copper, pour order 6): -24020,-40331.01 -24020,-41362 -24073.61,-41415.61 -24076,-41418 -24277,-41418 -24277,-43033.08 -24243.08,-43067 -21101,-43067 -21101,-40168 -21168,-40101
AGND on Bottom Layer "Bottom Layer-No Net" (solid, remove dead copper, pour order 2): -29550,-39551 -29180,-39921 -29180,-43649 -25046.81,-43649 -24430,-43032.19 -24430,-41364.18 -24088.69,-41364.18 -24066,-41341.49 -24066,-40332.01
DGND on Bottom Layer "Bottom Layer-No Net" (solid, remove dead copper, pour order 4): -20980,-43167 -20980,-40152 -21005,-40127 -21046,-40168 -24020,-40168 -24020,-41362 -24076,-41418 -24080,-41414 -24229,-41414 -24277,-41414 -24277,-42630 -24277,-43129 -24246,-43160
VCC_24V on Bottom Layer "Bottom Layer-No Net" (solid, pour order 8): -28610,-41983 -28612,-41985 -28612,-42559 -27950,-42559 -27949,-42558 -27949,-41981

## Keep-outs
Keep-Out Layer:
  lines w39.37: -29086.44,-40424.1 cw(c-28971.8,-40418.8) -28967.11,-40304.13 -21321.75,-40304.09 ; -29086.39,-42950.42 ccw(c-28979.12,-42952.25) -28980.95,-43059.52 ; -29086,-42950.81 -29086,-40424.1 ; -28976.81,-43060 -21312.62,-43060 ; -21316.14,-40303.65 cw(c-21319.16,-40410.22) -21212.59,-40413.25 ; -21313.01,-43060.39 ccw(c-21308.64,-42963.74) -21211.98,-42968.11 ; -21211.98,-42959.37 -21211.98,-40413.86

## Silkscreen, mask and mechanical layers (free items; w line width, h text height)
Top Overlay:
  drawing of 3879 lines, arcs and shapes, not listed
  text "BABA03A_V3.0.0" at -27573,-41166 h40
  text "2018-3-26" at -26940,-41166 h40

## Text inside footprints (layer, text, board x,y; h text height)
C30: Top Overlay "+" at -27219.41,-42320 h40 r180
C33: Top Overlay "+" at -27184.59,-41861 h40